# Altium PCB Projekat.PcbDoc
Units mm, origin at the board's own origin, x right, y up, seen from the top; angles counter-clockwise.
Board outline 89.78 x 94.8 mm, 2 copper layers (F.Cu, B.Cu); 71 components, 66 nets, 225 pads, 16 vias.
Unrouted connection lines stored in the file: 6.
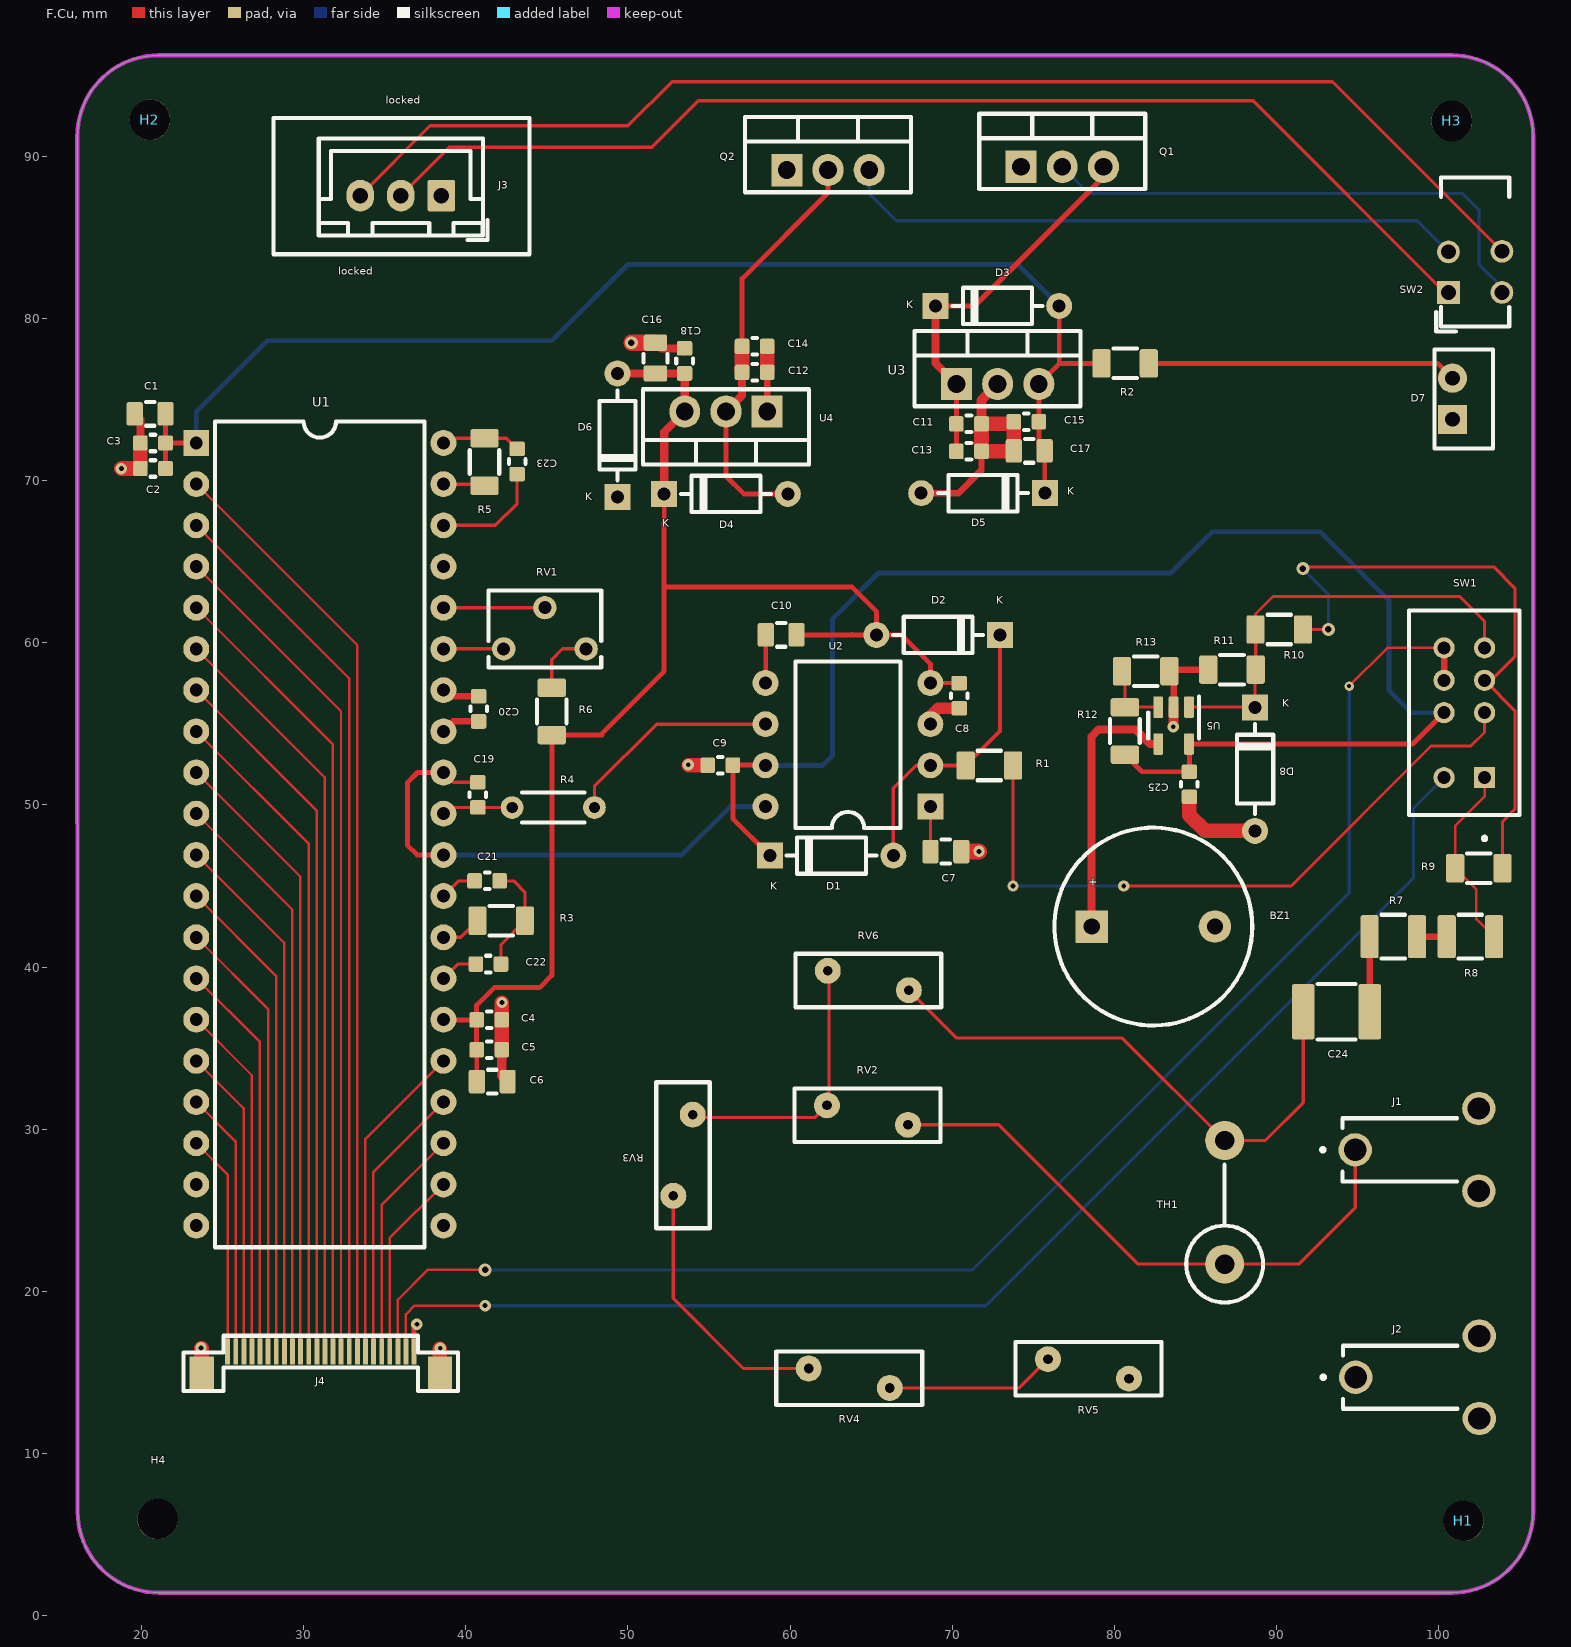
[diagram p0: F.Cu view]
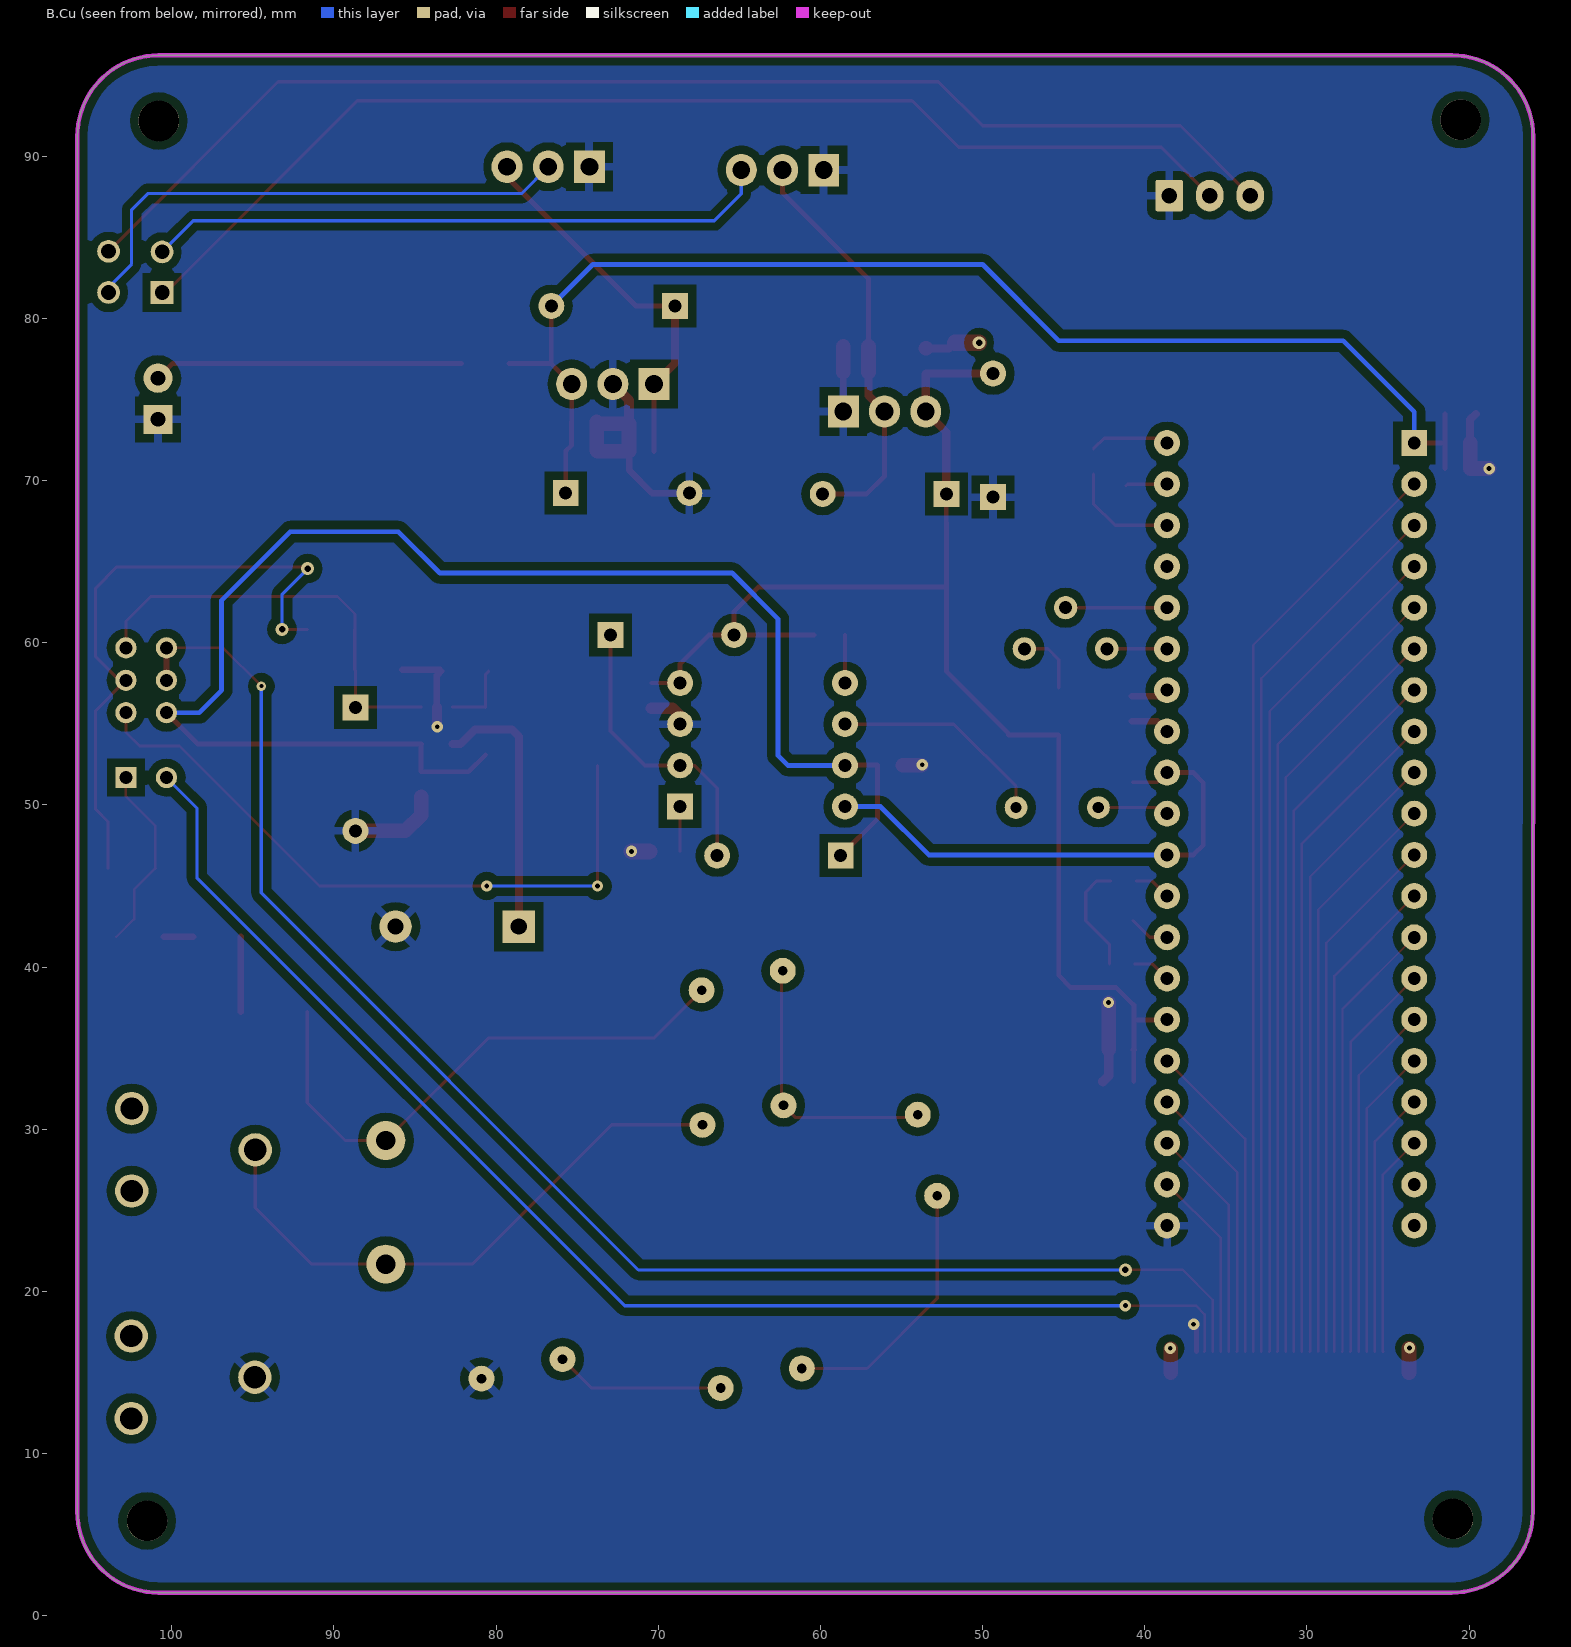
[diagram p1: B.Cu view, seen from below]

## Layer stack, top to bottom
F.Mask: solder mask 0.0102, Solder Resist, Dk 3.5
F.Cu: signal copper 0.0356
Dielectric 1: dielectric 0.32, FR-4, Dk 4.8
B.Cu: signal copper 0.0356
B.Mask: solder mask 0.0102, Solder Resist, Dk 3.5

## Board outline
100.825,1.425 ccw(c100.825,6.425) 105.825,6.425 105.825,91.225 ccw(c100.825,91.225) 100.825,96.225 21.05,96.225 ccw(c21.05,91.225) 16.05,91.225 16.074,6.424 ccw(c21.074,6.425) 21.074,1.425 100.825,1.425

## Design rules (kind name [scope] priority, off if disabled: settings)
Clearance "Clearence 0.508_Polygon" [InNamedPolygon('B.Cu-GND')] p1: gap=0.508 ignorepadtopadclearanceinfootprint=FALSE
MinimumSolderMaskSliver [All] p1: minsoldermaskwidth=0
PolygonConnect Polygon_B.Cu-GND_ConnectDirect [IsNamedPolygon('B.Cu-GND') vs IsVia] p1: connectstyle=Direct reliefconductorwidth=0.254 reliefentries=4 polygonreliefangle="90 Angle" airgapwidth=0.254
PolygonConnect Polygon_B.Cu-GND_ConnectRelief45 [IsNamedPolygon('B.Cu-GND') vs (IsThruPin or IsSMTPin) and (PadShape_AllLayers = 'Round')] p2: connectstyle=Relief reliefconductorwidth=0.5 reliefentries=4 polygonreliefangle="45 Angle" airgapwidth=0.5
PolygonConnect Polygon_B.Cu-GND_ConnectRelief90 [IsNamedPolygon('B.Cu-GND') vs (IsThruPin or IsSMTPin) and (PadShape_AllLayers <> 'Round')] p3: connectstyle=Relief reliefconductorwidth=0.5 reliefentries=4 polygonreliefangle="90 Angle" airgapwidth=0.5
RoutingVias [All] p1: holewidth=0.711 width=1.27 viastyle="Through Hole" minholewidth=0.711 minwidth=1.27 maxholewidth=0.711 maxwidth=1.27
SilkToSilkClearance [All] p1: silktosilkclearance=0
SilkToSolderMaskClearance [IsPad] p1: minsilkscreentomaskgap=0 clearancetoexposedcopper=TRUE
SolderMaskExpansion [All] p1: expansion=0.102 istentingtop=FALSE
Width [All] p1: maxlimit=10 minlimit=0.254 preferedwidth=0.254 minimp=50.000000 maximp=50.000000 favimp=50.000000
27 further rules are at their usual default settings.

## Components (designator, comment, footprint, x,y, rotation, side; value= is the part's Value field where it differs from the comment)
BZ1 "Buzzer" Buzzer_12x9.5RM7.6 78.6,42.5 r0 top
C1 "10u" C_0805_2012Metric 20.54,74.117 r180 top
C2 "100n" C_0603_1608Metric 20.715,70.747 r180 top
C3 "100n" C_0603_1608Metric 20.715,72.317 r180 top
C4 "100n" C_0603_1608Metric 41.45,36.747 r180 top
C5 "100n" C_0603_1608Metric 41.45,34.902 r180 top
C6 "10u" C_0805_2012Metric 41.635,32.94 r180 top
C7 "10u" C_0805_2012Metric 69.61,47.125 r0 top
C8 "100n" C_0603_1608Metric 70.43,56.74 r270 top
C9 "100n" C_0603_1608Metric 55.7,52.45 r180 top
C10 "3u3" C_0805_2012Metric 59.45,60.49 r0 top
C11 "100u" C_0603_1608Metric 71.03,73.495 r0 top
C12 "100u" C_0603_1608Metric 57.815,76.675 r180 top
C13 "100n" C_0603_1608Metric 71.03,71.805 r0 top
C14 "100n" C_0603_1608Metric 57.815,78.275 r0 top
C15 "100n" C_0603_1608Metric 74.573,73.63 r180 top
C16 "100n" C_0603_1608Metric 53.495,77.38 r90 top
C17 "1u" C_0805_2012Metric 74.75,71.835 r180 top
C18 "1u" C_0805_2012Metric 51.7,77.555 r270 top
C19 "20p" C_0603_1608Metric 40.75,50.622 r90 top
C20 "100n" C_0603_1608Metric 40.8,55.922 r270 top
C21 "470n" C_0603_1608Metric 41.32,45.317 r180 top
C22 "220n" C_0603_1608Metric 41.4,40.187 r0 top
C23 "100p" C_0603_1608Metric 43.17,71.177 r270 top
C24 "22n" C_1812_4532Metric 93.7,37.25 r0 top
C25 "100n" C_0603_1608Metric 84.625,51.27 r270 top
D1 "1N4148" D_DO-35_SOD27_P7.62mm_Horizontal 58.75,46.88 r0 top
D2 "1N4148" D_DO-35_SOD27_P7.62mm_Horizontal 72.94,60.485 r180 top
D3 "1N4448" D_DO-35_SOD27_P7.62mm_Horizontal 68.977,80.77 r0 top
D4 "1N4448" D_DO-35_SOD27_P7.62mm_Horizontal 52.24,69.18 r0 top
D5 "1N4448" D_DO-35_SOD27_P7.62mm_Horizontal 75.707,69.225 r180 top
D6 "1N4448" D_DO-35_SOD27_P7.62mm_Horizontal 49.36,68.985 r90 top
D7 "Power ON" LED_D5.0mm_Horizontal_O6.35mm_Z15.0mm 100.85,73.775 r90 top
D8 "1N5712" D_DO-35_SOD27_P7.62mm_Horizontal 88.675,56.02 r270 top
H1 "MountingHole" MountingHole_2.5mm 101.525,5.85 r0 top
H2 "MountingHole" MountingHole_2.5mm 20.525,92.25 r0 top
H3 "MountingHole" MountingHole_2.5mm 100.8,92.175 r0 top
H4 "MountingHole" MountingHole_2.5mm 21,5.975 r0 top
J1 "VAC" TE_350180 94.85,28.735 r0 top
J2 "COMM" TE_350180 94.88,14.71 r0 top
J3 "Battery connector" JST_XH_B3B-XH-A_1x03_P2.50mm_Vertical 38.5,87.575 r180 top
J4 "FPC Connector" FPC_24 31.07,16.29 r0 top
Q1 "IRF4905" TO-220-3_Vertical 74.245,89.35 r0 top
Q2 "IRF4905" TO-220-3_Vertical 59.8,89.15 r0 top
R1 "47K" R_1206_3216Metric 72.29,52.435 r0 top
R2 "330" R_1206_3216Metric 80.663,77.225 r0 top
R3 "47K" R_1206_3216Metric 42.186,42.861 r0 top
R4 "1M" R_Axial_DIN0204_L3.6mm_D1.6mm_P5.08mm_Horizontal 42.86,49.84 r0 top
R5 "100K" R_1206_3216Metric 41.16,71.147 r90 top
R6 "24K" R_1206_3216Metric 45.31,55.765 r90 top
R7 "9M" R_1210_3225Metric 97.2,41.875 r0 top
R8 "900K" R_1210_3225Metric 101.95,41.875 r180 top
R9 "90K" R_1206_3216Metric 102.475,46.1 r0 top
R10 "9K" R_1206_3216Metric 90.162,60.82 r180 top
R11 "1K" R_1206_3216Metric 87.25,58.345 r180 top
R12 "11K" R_1206_3216Metric 80.65,54.557 r90 top
R13 "1K5" R_1206_3216Metric 81.925,58.245 r0 top
RV1 "Naponska referenca (100mV)" Potentiometer_Bourns_3266W_Vertical 42.345,59.625 r180 top
RV2 "910V" RV_Disc_D9mm_W3.3mm_P5mm 67.275,30.275 r180 top
RV3 "910V" RV_Disc_D9mm_W3.3mm_P5mm 54,30.9 r270 top
RV4 "910V" RV_Disc_D9mm_W3.3mm_P5mm 61.15,15.25 r0 top
RV5 "910V" RV_Disc_D9mm_W3.3mm_P5mm 75.9,15.825 r0 top
RV6 "910V" RV_Disc_D9mm_W3.3mm_P5mm 67.325,38.575 r180 top
SW1 "Range selection" SW_EG2310 101.575,55.687 r90 top
SW2 "Power ON/OFF" SW_CuK_JS202011AQN_DPDT_Angled 100.599,81.6 r90 top
TH1 "PTC" R_Axial_DIN0414_L11.9mm_D4.5mm_P7.62mm_Vertical 86.8,21.69 r90 top
U1 "ICL7107CPL" DIP-40_W15.24mm 23.385,72.32 r0 top
U2 "AD737" DIP-8_W10.16mm 68.65,49.9 r180 top
U3 "L7805" TO-220-3_Vertical 70.26,75.955 r0 top
U4 "L7905" TO-220-3_Vertical 58.59,74.26 r180 top
U5 "MAX9075" SOT-23-5 83.65,54.895 r270 top

## Footprints (in the part's own frame and the unit in brackets; to place one, negate y for a bottom-side part, rotate by r counter-clockwise, add the part's x,y. Pads: shape width x height; smd on the part's side, far side on the other; paste and mask are expansions set on the pad)
Buzzer_12x9.5RM7.6 [mm]
  rect 2x2 hole 1 paste-2539.97 mask+0: 1(0,0)
  round 2 hole 1 paste-2539.97 mask+0: 2(7.6,0)
  silkscreen extent -2.3,-6.1 9.9,6.1
C_0603_1608Metric [mm]
  rrect25% 0.9x0.95 smd mask+0: 1(-0.775,0) 2(0.775,0)
  silkscreen extent -0.14,-0.51 0.14,0.51
C_0805_2012Metric [mm]
  rrect25% 1x1.45 smd mask+0: 1(-0.95,0) 2(0.95,0)
  silkscreen extent -0.26,-0.73 0.26,0.73
C_1812_4532Metric [mm]
  rrect18% 1.4x3.4 smd mask+0: 1(-2.05,0) 2(2.05,0)
  silkscreen extent -1.16,-1.71 1.16,1.71
D_DO-35_SOD27_P7.62mm_Horizontal [mm]
  rect 1.6x1.6 hole 0.8 paste-2539.97 mask+0: 1(0,0)
  rrect100% 1.6x1.6 hole 0.8 paste-2539.97 mask+0: 2(7.62,0)
  silkscreen extent 1.04,-1.12 6.58,1.12
DIP-8_W10.16mm [mm]
  rect 1.6x1.6 hole 0.8 paste-2539.97 mask+0: 1(0,0)
  rrect100% 1.6x1.6 hole 0.8 paste-2539.97 mask+0: 2(0,-2.54) 3(0,-5.08) 4(0,-7.62) 5(10.16,-7.62) 6(10.16,-5.08) 7(10.16,-2.54) 8(10.16,0)
  silkscreen extent 1.85,-8.95 8.31,1.33
DIP-40_W15.24mm [mm]
  rect 1.6x1.6 hole 0.8 paste-2539.97 mask+0: 1(0,0)
  rrect100% 1.6x1.6 hole 0.8 paste-2539.97 mask+0: 2(0,-2.54) 3(0,-5.08) 4(0,-7.62) 5(0,-10.16) 6(0,-12.7) 7(0,-15.24) 8(0,-17.78) 9(0,-20.32) 10(0,-22.86) 11(0,-25.4) 12(0,-27.94) 13(0,-30.48) 14(0,-33.02) 15(0,-35.56) 16(0,-38.1) 17(0,-40.64) 18(0,-43.18) 19(0,-45.72) 20(0,-48.26) 21(15.24,-48.26) 22(15.24,-45.72) 23(15.24,-43.18) 24(15.24,-40.64) 25(15.24,-38.1) 26(15.24,-35.56) 27(15.24,-33.02) 28(15.24,-30.48) 29(15.24,-27.94) 30(15.24,-25.4) 31(15.24,-22.86) 32(15.24,-20.32) 33(15.24,-17.78) 34(15.24,-15.24) 35(15.24,-12.7) 36(15.24,-10.16) 37(15.24,-7.62) 38(15.24,-5.08) 39(15.24,-2.54) 40(15.24,0)
  silkscreen extent 1.16,-49.59 14.08,1.33
FPC_24 [mm]
  rect 1.5x2 smd mask+0: 0(-7.35,-1.3) 0(7.35,-1.3)
  rect 0.3x1.6 smd mask+0: 1(-5.75,0) 2(-5.25,0) 3(-4.75,0) 4(-4.25,0) 5(-3.75,0) 6(-3.25,0) 7(-2.75,0) 8(-2.25,0) 9(-1.75,0) 10(-1.25,0) 11(-0.75,0) 12(-0.25,0) 13(0.25,0) 14(0.75,0) 15(1.25,0) 16(1.75,0) 17(2.25,0) 18(2.75,0) 19(3.25,0) 20(3.75,0) 21(4.25,0) 22(4.75,0) 23(5.25,0) 24(5.75,0)
  silkscreen extent -8.46,-2.42 8.46,0.98
JST_XH_B3B-XH-A_1x03_P2.50mm_Vertical [mm]
  rrect15% 1.7x1.95 hole 0.95 paste-2539.97 mask+0: 1(0,0)
  rrect100% 1.7x1.95 hole 0.95 paste-2539.97 mask+0: 2(2.5,0) 3(5,0)
  silkscreen extent -2.85,-3.51 7.56,2.75
LED_D5.0mm_Horizontal_O6.35mm_Z15.0mm [mm]
  rect 1.8x1.8 hole 0.9 paste-2539.97 mask+0: 1(0,0)
  round 1.8 hole 0.9 paste-2539.97 mask+0: 2(2.54,0)
  silkscreen extent -1.8,-2.5 4.3,1.1
MountingHole_2.5mm [mm]
  round 2.5 hole 2.5 paste-2539.97 mask+0: Un1(0,0)
Potentiometer_Bourns_3266W_Vertical [mm]
  round 1.44 hole 0.8 paste-2539.97 mask+0: 1(0,0) 2(-2.54,-2.54) 3(-5.08,0)
  silkscreen extent -6.01,-3.6 0.93,1.14
R_1206_3216Metric [mm]
  rrect22% 1.125x1.75 smd mask+0: 1(-1.462,0) 2(1.462,0)
  silkscreen extent -0.73,-0.91 0.73,0.91
R_1210_3225Metric [mm]
  rrect22% 1.125x2.65 smd mask+0: 1(-1.462,0) 2(1.462,0)
  silkscreen extent -0.72,-1.36 0.72,1.36
R_Axial_DIN0204_L3.6mm_D1.6mm_P5.08mm_Horizontal [mm]
  round 1.4 hole 0.7 paste-2539.97 mask+0: 1(0,0)
  rrect100% 1.4x1.4 hole 0.7 paste-2539.97 mask+0: 2(5.08,0)
  silkscreen extent 0.62,-0.92 4.46,0.92
R_Axial_DIN0414_L11.9mm_D4.5mm_P7.62mm_Vertical [mm]
  round 2.4 hole 1.2 paste-2539.97 mask+0: 1(0,0)
  rrect100% 2.4x2.4 hole 1.2 paste-2539.97 mask+0: 2(7.62,0)
  silkscreen extent -2.37,-2.37 6.12,2.37
RV_Disc_D9mm_W3.3mm_P5mm [mm]
  round 1.6 hole 0.6 paste-2539.97 mask+0: 1(0,0) 2(5,-1.2)
  silkscreen extent -2,-2.25 7,1.05
SOT-23-5 [mm]
  rrect25% 1.325x0.6 smd mask+0: 1(-1.138,0.95) 2(-1.138,0) 3(-1.138,-0.95) 4(1.138,-0.95) 5(1.138,0.95)
  silkscreen extent -1.8,-1.56 0.8,1.56
SW_CuK_JS202011AQN_DPDT_Angled [mm]
  rect 1.4x1.4 hole 0.9 paste-2539.97 mask+0: 1(0,0)
  round 1.4 hole 0.9 paste-2539.97 mask+0: 2(2.5,0) 3(2.54,-3.3) 4(0,-3.3)
  silkscreen extent -2.4,-3.75 7.1,0.75
SW_EG2310 [mm]
  rect 1.308x1.308 hole 0.8 paste-2539.97 mask+0.102: 1(-4,-1.25)
  round 1.308 hole 0.8 paste-2539.97 mask+0.102: 2(0,-1.25) 3(2,-1.25) 4(4,-1.25) 5(-4,1.25) 6(0,1.25) 7(2,1.25) 8(4,1.25)
  silkscreen extent -7.85,-3.4 6.3,3.4
TE_350180 [mil]
  round 81 hole 54 paste-99999 mask+4.02: 1(0,0) S1(300,100) S2(300,-100)
  silkscreen extent -83,-76 247,76
TO-220-3_Vertical [mm]
  rect 1.905x2 hole 1.1 paste-2539.97 mask+0: 1(0,0)
  rrect100% 1.905x2 hole 1.1 paste-2539.97 mask+0: 2(2.54,0) 3(5.08,0)
  silkscreen extent -2.58,-1.37 7.66,3.27

## Part data
BZ1: library part Buzzer_12x9.5RM7.6, "Generic Buzzer, D12mm height 9.5mm with RM7.6mm", Sheetfile=Input.kicad_sch, Sheetname=Input, ki_description="Buzzer, polarized", ki_keywords="quartz resonator ceramic"
C1 C6 C10 C17 C18: library part C_0805_2012Metric, "Capacitor SMD 0805 (2012 Metric), square (rectangular) end terminal, IPC_7351 nominal, (Body size source: IPC-SM-782 page 76, https://www.pcb-3d.com/wordpress/wp-content/uploads/ipc-sm-782a_amendment_1_and_2.pdf, https://docs.google.com/spreadsheets/d/1BsfQQcO9C6DZCsRaXUlFlo91Tg2WpOkGARC1WS5S8t0/edit?usp=sharing), generated with kicad-footprint-generator", Rated Voltage=16V
  C1 C6: Sheetfile=Projekat.kicad_sch
  C10: Sheetfile=rmstodc.kicad_sch, Sheetname=RMS-DC
  C17 C18: Sheetfile=VoltageSupply.kicad_sch, Sheetname="Voltage Supply 5V"
C2 C3 C4 C5 C8 C9 C13 C14 C15 C16 C19 C20 C21 C22 C23 C25: library part C_0603_1608Metric, "Capacitor SMD 0603 (1608 Metric), square (rectangular) end terminal, IPC_7351 nominal, (Body size source: IPC-SM-782 page 76, https://www.pcb-3d.com/wordpress/wp-content/uploads/ipc-sm-782a_amendment_1_and_2.pdf), generated with kicad-footprint-generator", ki_description="Unpolarized capacitor", ki_keywords="cap capacitor"
  C2 C3 C4 C5: Sheetfile=Projekat.kicad_sch
  C8 C9: Sheetfile=rmstodc.kicad_sch, Sheetname=RMS-DC
  C13 C14 C15 C16: Sheetfile=VoltageSupply.kicad_sch, Sheetname="Voltage Supply 5V"
  C19 C20 C21 C22 C23: Sheetfile=icl7107pins.kicad_sch, Sheetname=7107-PINS
  C25: Sheetfile=Input.kicad_sch, Sheetname=Input
C7: library part C_0805_2012Metric, "Capacitor SMD 0805 (2012 Metric), square (rectangular) end terminal, IPC_7351 nominal, (Body size source: IPC-SM-782 page 76, https://www.pcb-3d.com/wordpress/wp-content/uploads/ipc-sm-782a_amendment_1_and_2.pdf, https://docs.google.com/spreadsheets/d/1BsfQQcO9C6DZCsRaXUlFlo91Tg2WpOkGARC1WS5S8t0/edit?usp=sharing), generated with kicad-footprint-generator", Sheetfile=rmstodc.kicad_sch, Sheetname=RMS-DC, ki_description="Unpolarized capacitor", ki_keywords="cap capacitor"
C11 C12: library part C_0603_1608Metric, "Capacitor SMD 0603 (1608 Metric), square (rectangular) end terminal, IPC_7351 nominal, (Body size source: IPC-SM-782 page 76, https://www.pcb-3d.com/wordpress/wp-content/uploads/ipc-sm-782a_amendment_1_and_2.pdf), generated with kicad-footprint-generator", Rated Voltage=16V, Sheetfile=VoltageSupply.kicad_sch, Sheetname="Voltage Supply 5V"
C24: library part C_1812_4532Metric, "Capacitor SMD 1812 (4532 Metric), square (rectangular) end terminal, IPC_7351 nominal, (Body size source: IPC-SM-782 page 76, https://www.pcb-3d.com/wordpress/wp-content/uploads/ipc-sm-782a_amendment_1_and_2.pdf), generated with kicad-footprint-generator", Rated Voltage=1200V, Sheetfile=Input.kicad_sch, Sheetname=Input, ki_description="Unpolarized capacitor", ki_keywords="cap capacitor"
D1 D2 D3 D4 D5 D6 D8: library part D_DO-35_SOD27_P7.62mm_Horizontal, "Diode, DO-35_SOD27 series, Axial, Horizontal, pin pitch=7.62mm, , length*diameter=4*2mm^2, , http://www.diodes.com/_files/packages/DO-35.pdf"
  D1 D2: Sheetfile=rmstodc.kicad_sch, Sheetname=RMS-DC, ki_description="100V 0.15A standard switching diode, DO-35", ki_keywords=diode
  D3 D4 D5 D6: Sheetfile=VoltageSupply.kicad_sch, Sheetname="Voltage Supply 5V", ki_description="100V 0.15A High-speed standard diode, DO-35", ki_keywords=diode
  D8: Sheetfile=Input.kicad_sch, Sheetname=Input, ki_description="20V 75mA Schottky diode, DO-35", ki_keywords="diode Schottky"
D7: library part LED_D5.0mm_Horizontal_O6.35mm_Z15.0mm, "LED, diameter 5.0mm z-position of LED center 3.0mm, 2 pins, diameter 5.0mm z-position of LED center 3.0mm, 2 pins, diameter 5.0mm z-position of LED center 3.0mm, 2 pins, diameter 5.0mm z-position of LED center 9.0mm, 2 pins, diameter 5.0mm z-position of LED center 9.0mm, 2 pins, diameter 5.0mm z-position of LED center 9.0mm, 2 pins, diameter 5.0mm z-position of LED center 15.0mm, 2 pins, diameter 5.0mm z-position of LED center 15.0mm, 2 pins, diameter 5.0mm z-position of LED center 15.0mm, 2 pins", Sheetfile=VoltageSupply.kicad_sch, Sheetname="Voltage Supply 5V", ki_description="Light emitting diode", ki_keywords="LED diode"
H1 H2 H3 H4: library part MountingHole_2.5mm, "Mounting Hole 2.5mm, no annular", Sheetfile=Projekat.kicad_sch, ki_description="Mounting Hole without connection", ki_keywords="mounting hole"
J1 J2: library part TE_350180, Sheetfile=Input.kicad_sch, Sheetname=Input, ki_description="Generic connector, single row, 01x01, script generated (kicad-library-utils/schlib/autogen/connector/)", ki_keywords=connector
J3: library part JST_XH_B3B-XH-A_1x03_P2.50mm_Vertical, "JST XH series connector, B3B-XH-A (http://www.jst-mfg.com/product/pdf/eng/eXH.pdf), generated with kicad-footprint-generator", Sheetfile=Battery.kicad_sch, Sheetname=Battery, ki_description="Generic connector, single row, 01x03, script generated (kicad-library-utils/schlib/autogen/connector/)", ki_keywords=connector
J4: library part FPC_24, Sheetfile=ffccon.kicad_sch, Sheetname="FFC Connector", ki_description="Generic connector, single row, 01x24, script generated (kicad-library-utils/schlib/autogen/connector/)", ki_keywords=connector
Q1 Q2 U3 U4: library part TO-220-3_Vertical, "TO-220-3, Vertical, RM 2.54mm, see https://www.vishay.com/docs/66542/to-220-1.pdf"
  Q1 Q2: Sheetfile=Battery.kicad_sch, Sheetname=Battery, ki_description="-74A Id, -55V Vds, Single P-Channel HEXFET Power MOSFET, 20mOhm Ron, TO-220AB", ki_keywords="Single P-Channel HEXFET Power MOSFET"
  U3: Sheetfile=VoltageSupply.kicad_sch, Sheetname="Voltage Supply 5V", ki_description="Positive 1.5A 35V Linear Regulator, Fixed Output 5V, TO-220/TO-263/TO-252", ki_keywords="Voltage Regulator 1.5A Positive"
  U4: Sheetfile=VoltageSupply.kicad_sch, Sheetname="Voltage Supply 5V", ki_description="Negative 1.5A 35V Linear Regulator, Fixed Output -5V, TO-220/TO-263", ki_keywords="Voltage Regulator 1.5A Negative"
R1: library part R_1206_3216Metric, "Resistor SMD 1206 (3216 Metric), square (rectangular) end terminal, IPC_7351 nominal, (Body size source: IPC-SM-782 page 72, https://www.pcb-3d.com/wordpress/wp-content/uploads/ipc-sm-782a_amendment_1_and_2.pdf), generated with kicad-footprint-generator", Power Rating=1W, Sheetfile=rmstodc.kicad_sch, Sheetname=RMS-DC, ki_description="Resistor, US symbol", ki_keywords="R res resistor"
R2 R3 R5 R6 R9 R10 R11 R12 R13: library part R_1206_3216Metric, "Resistor SMD 1206 (3216 Metric), square (rectangular) end terminal, IPC_7351 nominal, (Body size source: IPC-SM-782 page 72, https://www.pcb-3d.com/wordpress/wp-content/uploads/ipc-sm-782a_amendment_1_and_2.pdf), generated with kicad-footprint-generator", ki_description="Resistor, US symbol", ki_keywords="R res resistor"
  R2: Sheetfile=VoltageSupply.kicad_sch, Sheetname="Voltage Supply 5V"
  R3 R5 R6: Sheetfile=icl7107pins.kicad_sch, Sheetname=7107-PINS
  R9 R10 R11 R12 R13: Sheetfile=Input.kicad_sch, Sheetname=Input
R4: library part R_Axial_DIN0204_L3.6mm_D1.6mm_P5.08mm_Horizontal, "Resistor, Axial_DIN0204 series, Axial, Horizontal, pin pitch=5.08mm, 0.167W, length*diameter=3.6*1.6mm^2, http://cdn-reichelt.de/documents/datenblatt/B400/1_4W%23YAG.pdf", Sheetfile=icl7107pins.kicad_sch, Sheetname=7107-PINS, ki_description="Resistor, US symbol", ki_keywords="R res resistor"
R7 R8: library part R_1210_3225Metric, "Resistor SMD 1210 (3225 Metric), square (rectangular) end terminal, IPC_7351 nominal, (Body size source: IPC-SM-782 page 72, https://www.pcb-3d.com/wordpress/wp-content/uploads/ipc-sm-782a_amendment_1_and_2.pdf), generated with kicad-footprint-generator", Sheetfile=Input.kicad_sch, Sheetname=Input, ki_description="Resistor, US symbol", ki_keywords="R res resistor"
RV1: library part Potentiometer_Bourns_3266W_Vertical, "Potentiometer, vertical, Bourns 3266W, https://www.bourns.com/docs/Product-Datasheets/3266.pdf", Sheetfile=icl7107pins.kicad_sch, Sheetname=7107-PINS, Val=100mV, ki_description="Trim-potentiometer, US symbol", ki_keywords="resistor variable trimpot trimmer"
RV2 RV3 RV4 RV5 RV6: library part RV_Disc_D9mm_W3.3mm_P5mm, "Varistor, diameter 9mm, width 3.3mm, pitch 5mm", Sheetfile=Input.kicad_sch, Sheetname=Input, ki_description="Voltage dependent resistor", ki_keywords="VDR resistance"
SW1: library part SW_EG2310, MANUFACTURER=E-Switch, MAXIMUM_PACKAGE_HEIGHT=4.7mm, Package=None, Availability="In Stock", Check_prices=https://www.snapeda.com/parts/EG2310/E-Switch/view-part/?ref=eda, Description="\nSlide Switch DP3T Through Hole, Right Angle\n", MF=E-Switch, MP=EG2310, PARTREV=-, Price=None, Purchase-URL=https://www.snapeda.com/api/url_track_click_mouser/?unipart_id=396456&manufacturer=E-Switch&part_name=EG2310&search_term=None, SNAPEDA_PN=EG2310, STANDARD="Manufacturer Recommendations", Sheetfile=Input.kicad_sch, Sheetname=Input, SnapEDA_Link=https://www.snapeda.com/parts/EG2310/E-Switch/view-part/?ref=snap
SW2: library part SW_CuK_JS202011AQN_DPDT_Angled, "CuK sub miniature slide switch, JS series, DPDT, right angle, http://www.ckswitches.com/media/1422/js.pdf", Sheetfile=Battery.kicad_sch, Sheetname=Battery, ki_description="Double Pole Single Throw (DPST) Switch", ki_keywords="switch dual double-pole single-throw OFF-ON"
TH1: library part R_Axial_DIN0414_L11.9mm_D4.5mm_P7.62mm_Vertical, "Resistor, Axial_DIN0414 series, Axial, Vertical, pin pitch=7.62mm, 2W, length*diameter=11.9*4.5mm^2, http://www.vishay.com/docs/20128/wkxwrx.pdf", Sheetfile=Input.kicad_sch, Sheetname=Input, ki_description="Thermistor, temperature dependent resistor, US symbol", ki_keywords="R res thermistor"
U1: library part DIP-40_W15.24mm, "40-lead though-hole mounted DIP package, row spacing 15.24 mm (600 mils)", Sheetfile=Projekat.kicad_sch, ki_description="3 1/2 Digit, LED Display, A/D Converter, DIP-40", ki_keywords="LED ADC"
U2: library part DIP-8_W10.16mm, "8-lead though-hole mounted DIP package, row spacing 10.16 mm (400 mils)", Sheetfile=rmstodc.kicad_sch, Sheetname=RMS-DC
U5: library part SOT-23-5, "SOT, 5 Pin (https://www.jedec.org/sites/default/files/docs/Mo-178c.PDF variant AA), generated with kicad-footprint-generator ipc_gullwing_generator.py", Sheetfile=Input.kicad_sch, Sheetname=Input, ki_description="Single, 1.8V Low Power, Rail-to-Rail Input, Push-Pull Output Comparator, SOT-23-5/SC-70-5", ki_keywords=cmp

## Via types
v1: diameter 0.7, hole 0.3, F.Cu to B.Cu, tented both sides, 11 vias
v2: diameter 0.8, hole 0.4, F.Cu to B.Cu, tented both sides, 4 vias
v3: diameter 0.6, hole 0.25, F.Cu to B.Cu, tented both sides, 1 vias

## Nets (pads, with @x,y where several pads share a name; then routed paths per layer and width w, separated by ;. In a path a pad name is that pad's centre, name@x,y a point inside that pad or via, vN(x,y) a via of type N, cw(c..) or ccw(c..) an arc to the next point about the centre after c; other vN are vias at no path point)
20V_RANGE: J4.23 SW1.5 | length 82.6
  F.Cu w0.152: J4.23 36.31,16.3 36.31,18.585 36.85,19.125 v1(41.2,19.125)
  B.Cu w0.2: v1(41.2,19.125) 72.075,19.125 98.45,45.5 98.45,49.812 SW1.5
1000V_RANGE: J4.22 SW1.7 SW1.8 | length 93.8
  F.Cu w0.15: v3(94.475,57.325) 96.837,59.687 SW1.8
  F.Cu w0.152: J4.22 35.81,16.3 35.81,19.485 37.65,21.325 39.525,21.325 v2(41.2,21.325)
  F.Cu w0.4: SW1.7 SW1.8
  B.Cu w0.2: v2(41.2,21.325) 42.075,21.325 71.225,21.325 94.475,44.575 v3(94.475,57.325)
+5V: U1.1 U3.3
+9V: C11.1 C13.1 D3.1 Q1.3 U3.1 | length 23.8
  F.Cu w0.25: D3.1 D3.1@69.013,80.805
  F.Cu w0.3: C13.1 C11.1 70.26,73.5 U3.1
  F.Cu w0.305: D3.1 71.37,80.77 79.325,88.725 Q1.3
  F.Cu w0.5: D3.1 68.977,77.237 U3.1
-5V: C1.1 C2.1 C3.1 C4.2 C5.2 C6.2 C8.1 C9.1 C10.2 C15.1 C16.1 C16.2 C17.1 C18.1 C18.2 C25.1 D1.1 D2.2 D3.2 D4.1 D5.1 D6.2 R2.1 R6.1 R12.1 SW1.6 U1.26 U2.4 U2.7 U4.3 U5.5 | length 261.1
  F.Cu w0.2: C16.1 C16.1@53.51,76.59
  F.Cu w0.25: v2(50.215,78.5) v2@50.22,78.505 ; C10.2 C10.2@60.405,60.485 ; U2.4 68.655,57.515 C8.1
  F.Cu w0.3: C2.1 C3.1 C1.1 ; U1.26 38.637,36.747 C4.2 ; C5.2 C4.2 ; C6.2 C5.2@40.685,34.892 ; 48.402,54.302 48.3,54.302 R6.1 45.31,39.49 44.56,38.74 41.76,38.74 40.675,37.655 C4.2 ; 52.24,67.39 D4.1 ; C10.2 63.3,60.49 63.85,60.49 ; 63.815,60.525 63.85,60.49 ; U2.4 68.65,58.7 66.865,60.485 D2.2 65.315,60.49 63.85,60.49 ; D5.1 75.707,71.827 C17.1 75.347,72.187 C15.1 75.34,73.637 75.34,75.955 76.597,77.212 ; D3.2 76.597,77.212 ; R2.1 79.187,77.212 76.597,77.212 ; R12.1 81.7,52.045 C25.1 84.625,53.732 U5.5 98.395,53.757 SW1.6
  F.Cu w0.305: C3.1 23.383,72.317 23.385,72.32 ; 48.3,54.302 52.24,58.242 52.24,63.45 ; 52.24,67.39 52.24,63.45 ; U2.7 58.48,52.45 C9.1 56.475,49.155 D1.1 ; D2.2 65.32,61.945 63.815,63.45 52.24,63.45
  F.Cu w0.4: C5.2 C5.2@40.685,34.892 ; C18.1 C18.1@51.705,78.5
  F.Cu w0.5: D6.2 C18.2 C16.1 ; C18.1@51.705,78.5 52.055,78.15 C16.2@53.49,78.15 ; D4.1 52.24,72.99 U4.3 C16.1@53.51,76.59
  F.Cu w0.9: C16.2@53.49,78.15 C16.2
  F.Cu w1: v2@50.22,78.505 C18.1
  B.Cu w0.3: U2.7 62.015,52.44 62.61,53.035 62.61,61.46 65.45,64.3 83.475,64.3 86.025,66.85 92.7,66.85 96.925,62.625 96.925,57.075 98.313,55.687 SW1.6 ; D5.1 D5.1@75.713,69.22
  B.Cu w0.305: 23.385,72.32 23.385,74.245 27.765,78.625 45.3,78.625 50,83.325 74.043,83.325 D3.2
-9V: C12.2 C14.1 D4.2 Q2.2 U4.2 | length 25.8
  F.Cu w0.25: C14.1@57.03,78.285 C14.1
  F.Cu w0.3: U4.2 56.05,70.275 57.145,69.18 D4.2
  F.Cu w0.305: C14.1 57.05,78.285 57.05,82.45 62.34,87.74 Q2.2
  F.Cu w0.5: U4.2 57.04,75.25 C12.2
  F.Cu w0.9: C12.2 C14.1
A-Z: C21.2 U1.29 | length 2.3
  F.Cu w0.2: U1.29 39.562,45.317 C21.2
AD737_COM: C19.2 RV1.1 U1.30 U1.32 U1.35 U2.8 | length 36
  F.Cu w0.2: U1.32 39.228,51.397 C19.2 ; U1.35 38.63,59.625 RV1.1
  F.Cu w0.3: U1.30 37.005,46.92 36.4,47.525 36.4,51.375 37.025,52 U1.32
  B.Cu w0.3: U1.30 53.32,46.92 56.3,49.9 U2.8
AD737_OUTPUT: R4.2 U2.6 | length 13.4
  F.Cu w0.2: R4.2 47.94,51.14 51.775,54.975 58.485,54.975 U2.6
BUFF: R3.1 U1.28 | length 2.5
  F.Cu w0.2: U1.28 39.703,41.84 R3.1
Cc: C7.1 U2.1 | length 2.8
  F.Cu w0.2: U2.1 68.66,49.89 C7.1
CREF+: C20.1 U1.34 | length 2.3
  F.Cu w0.4: U1.34 39.007,56.697 C20.1
CREF-: C20.2 U1.33 | length 2.4
  F.Cu w0.4: U1.33 39.232,55.147 C20.2
GND: BZ1.2 C1.2 C2.2 C3.2 C4.1 C5.1 C6.1 C7.2 C8.2 C9.2 C11.2 C12.1 C13.2 C14.2 C15.2 C17.2 C25.2 D5.2 D6.1 D7.1 D8.2 J2.1 J3.1 J4.24 Q1.1 Q2.1 R11.2 R13.2 RV5.2 U1.21 U2.3 U3.2 U4.1 U5.2 | length 47.8
  F.Cu w0.2: v1@71.635,47.125 v1(71.65,47.14)
  F.Cu w0.25: U2.3 U2.3@68.65,55.49 ; 71.805,74.917 71.805,74.96 ; C15.2@73.668,73.495 C15.2@73.8,73.627 ; C17.2@73.77,71.805 C17.2
  F.Cu w0.3: J4.24 36.82,17.809 v1(36.986,17.975)
  F.Cu w0.305: v1(18.77,70.74) v1@18.778,70.747 ; v1(53.725,52.475) v1@53.75,52.45 ; J2.1@94.795,14.625 J2.1
  F.Cu w0.4: v1@42.225,37.805 v1(42.235,37.815) ; U4.1 C12.1 ; D5.2 70.383,69.225 71.805,70.647 C13.2 ; C15.2 C15.2@73.8,73.627 ; v1(83.632,54.825) v1@83.65,54.842 ; U5.2 83.65,57.983 R13.2 83.487,58.345 R11.2
  F.Cu w0.5: C1.2 19.94,73.767 C3.2
  F.Cu w0.6: C5.1 42.225,33.3 C6.1 ; C11.2 71.805,74.917 ; 71.805,74.96 U3.2 ; v1@83.65,54.842 U5.2
  F.Cu w0.7: U2.3@68.65,55.49 69.125,55.965 C8.2
  F.Cu w0.9: v1@18.778,70.747 C2.2 C3.2 ; C5.1 C4.1 v1@42.225,37.805 ; v1@53.75,52.45 C9.2 ; C12.1 C14.2 ; C15.2@73.668,73.495 C11.2 C13.2 C17.2@73.77,71.805 ; C17.2 C15.2@73.8,73.627 ; C25.2 84.625,49.375 85.6,48.4 D8.2
  F.Cu w1: C7.2 v1@71.635,47.125
ICL7107_A1: J4.14 U1.5 | length 49.4
  F.Cu w0.152: U1.5 31.81,53.735 31.81,16.3 J4.14
ICL7107_A2: J4.7 U1.12 | length 30.1
  F.Cu w0.152: U1.12 28.31,39.455 28.31,16.3 J4.7
ICL7107_A3: J4.20 U1.23 | length 14.4
  F.Cu w0.152: J4.20 34.81,16.3 34.81,25.325 U1.23
ICL7107_AB4: U1.19
ICL7107_B1: J4.15 U1.4 | length 52.1
  F.Cu w0.152: U1.4 32.31,55.775 32.31,16.3 J4.15
ICL7107_B2: J4.8 U1.11 | length 32.9
  F.Cu w0.152: U1.11 28.81,41.495 28.81,16.3 J4.8
ICL7107_B3: J4.3 U1.16 | length 19.1
  F.Cu w0.152: U1.16 26.31,31.295 26.31,16.3 J4.3
ICL7107_C1: J4.16 U1.3 | length 54.9
  F.Cu w0.152: U1.3 32.81,57.815 32.81,16.3 J4.16
ICL7107_C2: J4.9 U1.10 | length 35.6
  F.Cu w0.152: U1.10 29.31,43.535 29.31,16.3 J4.9
ICL7107_C3: J4.19 U1.24 | length 17.2
  F.Cu w0.152: J4.19 34.31,16.3 34.31,27.365 U1.24
ICL7107_D1: J4.17 U1.2 | length 57.6
  F.Cu w0.152: U1.2 33.31,59.855 33.31,16.3 J4.17
ICL7107_D2: J4.10 U1.9 | length 38.4
  F.Cu w0.152: U1.9 29.81,45.575 29.81,16.3 J4.10
ICL7107_D3: J4.4 U1.15 | length 21.9
  F.Cu w0.152: U1.15 26.81,33.335 26.81,16.3 J4.4
ICL7107_E1: J4.11 U1.8 | length 41.1
  F.Cu w0.152: U1.8 30.31,47.615 30.31,16.3 J4.11
ICL7107_E2: J4.5 U1.14 | length 24.6
  F.Cu w0.152: U1.14 27.31,35.375 27.31,16.3 J4.5
ICL7107_E3: J4.1 U1.18 | length 13.7
  F.Cu w0.15: J4.1@25.31,16.28 J4.1
  F.Cu w0.152: U1.18 25.32,27.205 J4.1
ICL7107_F1: J4.13 U1.6 | length 46.6
  F.Cu w0.152: U1.6 31.31,51.695 31.31,16.3 J4.13
ICL7107_F2: J4.6 U1.13 | length 27.4
  F.Cu w0.152: U1.13 27.81,37.415 27.81,16.3 J4.6
ICL7107_F3: J4.2 U1.17 | length 16.4
  F.Cu w0.152: U1.17 25.81,29.255 25.81,16.3 J4.2
ICL7107_G1: J4.12 U1.7 | length 43.9
  F.Cu w0.152: U1.7 30.81,49.655 30.81,16.3 J4.12
ICL7107_G2: J4.18 U1.25 | length 19.9
  F.Cu w0.152: J4.18 33.81,16.3 33.81,29.405 U1.25
ICL7107_G3: J4.21 U1.22 | length 11.7
  F.Cu w0.152: J4.21 35.31,16.3 35.31,23.285 U1.22
IN_HI: C19.1 R4.1 U1.31 | length 4.4
  F.Cu w0.2: U1.31 39.013,49.847 C19.1 40.758,49.84 R4.1
INT: C22.1 U1.27 | length 2.4
  F.Cu w0.2: U1.27 39.512,40.187 C22.1
Net-(BZ1--): BZ1.1 U5.4 | length 16.4
  F.Cu w0.5: BZ1.1 78.6,49.15 78.6,54.225 79.025,54.65 81.3,54.65 82.193,53.757 U5.4
Net-(C21-Pad1): C21.1 C22.2 R3.2 | length 6.9
  F.Cu w0.2: C21.1 42.958,45.317 43.649,44.626 R3.2 42.175,41.387 C22.2
Net-(C24-Pad1): C24.1 RV6.1 TH1.2 | length 34.7
  F.Cu w0.2: RV6.1 70.275,35.625 80.485,35.625 TH1.2 89.31,29.31 91.65,31.65 C24.1
Net-(C24-Pad2): C24.2 R7.1 | length 4.6
  F.Cu w0.4: R7.1 95.737,37.262 C24.2
Net-(D1-A): D1.2 D2.1 R1.1 U2.2 | length 18.1
  F.Cu w0.2: D1.2 66.37,51.04 67.77,52.44 U2.2
  F.Cu w0.25: U2.2 68.655,52.435 R1.1 72.94,54.547 D2.1
Net-(D7-A): D7.2 R2.2 | length 19.1
  F.Cu w0.305: R2.2 99.94,77.225 D7.2
  F.Cu w0.4: D7.2@100.845,76.32 D7.2
Net-(J1-Pin_1): J1.1 RV2.1 TH1.1 | length 36.1
  F.Cu w0.2: RV2.1 72.875,30.275 81.46,21.69 TH1.1 91.365,21.69 94.85,25.175 J1.1
Net-(J3-Pin_1): J3.3 SW2.3 | length 77.6
  F.Cu w0.2: J3.3 37.8,91.875 50,91.875 52.725,94.6 93.45,94.6 103.899,84.151 SW2.3
Net-(J3-Pin_2): J3.2 SW2.1 | length 71.9
  F.Cu w0.2: J3.2 38.975,90.55 51.475,90.55 54.35,93.425 88.55,93.425 100.375,81.6 SW2.1
Net-(Q1-D): Q1.2 SW2.4 | length 32.5
  B.Cu w0.2: Q1.2 78.435,87.7 101.475,87.7 102.475,86.7 102.475,83.35 103.899,81.926 SW2.4
Net-(Q2-S): Q2.3 SW2.2 | length 38.7
  B.Cu w0.2: Q2.3 64.88,87.695 66.55,86.025 98.674,86.025 SW2.2
Net-(R6-Pad2): R6.2 RV1.3 | length 4.1
  F.Cu w0.2: R6.2 45.31,58.965 45.97,59.625 RV1.3
Net-(R7-Pad2): R7.2 R8.2 | length 1.8
  F.Cu w0.4: R7.2 R8.2
Net-(R8-Pad1): R8.1 R9.1 SW1.1 | length 11.6
  F.Cu w0.152: SW1.1 102.825,50.525 101.013,48.712 R9.1 102.325,44.787 102.325,42.962 R8.1
  F.Cu w0.2: R9.1@101,46.112 R9.1
Net-(R10-Pad1): R9.2 R10.1 SW1.3 | length 39
  F.Cu w0.2: R10.1 93.195,60.82 v2(93.2,60.825) ; v2(91.625,64.575) 91.725,64.675 103.4,64.675 104.7,63.375 104.7,59.15 103.237,57.687 SW1.3 104.7,55.812 104.7,49.725 103.925,48.95 103.925,46.112 R9.2
  B.Cu w0.2: v2(91.625,64.575) 93.2,63 v2(93.2,60.825)
Net-(RV2-Pad2): RV2.2 RV3.1 RV6.2 | length 17
  F.Cu w0.2: RV3.1 54.175,30.725 61.525,30.725 RV2.2 62.4,31.6 62.4,39.7 RV6.2
Net-(RV3-Pad2): RV3.2 RV4.1 | length 16.5
  F.Cu w0.2: RV3.2 52.8,19.575 57.125,15.25 RV4.1
Net-(RV4-Pad2): RV4.2 RV5.1 | length 10.5
  F.Cu w0.2: RV4.2 74.125,14.05 RV5.1
Net-(U2-Cav): C10.1 U2.5 | length 3
  F.Cu w0.25: U2.5 58.5,57.53 C10.1
Net-(U5--): R12.2 R13.1 U5.3 | length 4.4
  F.Cu w0.2: R13.1 80.65,58.057 R12.2 80.663,56.032 U5.3
OSC1: C23.1 R5.2 U1.40 | length 4.9
  F.Cu w0.2: U1.40 38.915,72.61 R5.2 42.513,72.61 C23.1
OSC2: R5.1 U1.39 | length 2.6
  F.Cu w0.2: U1.39 41.065,69.78 R5.1
OSC3: C23.2 U1.38 | length 6.9
  F.Cu w0.2: U1.38 41.835,67.24 43.17,68.575 C23.2
REF_HI: RV1.2 U1.36 | length 6.3
  F.Cu w0.2: U1.36 38.63,62.165 RV1.2
Threshold_voltage: D8.1 R10.2 R11.1 SW1.4 U5.1 | length 26.7
  F.Cu w0.178: R10.2 88.7,61.775 89.775,62.85 101.3,62.85 102.825,61.325 SW1.4
  F.Cu w0.2: U5.1 88.662,56.032 D8.1 88.675,58.307 R11.1 88.712,60.807 R10.2
unconnected-(U1-POL-Pad20): U1.20
unconnected-(U1-TEST-Pad37): U1.37
Vin: R1.2 SW1.2 | length 41.6
  F.Cu w0.178: v1(73.75,45) 73.752,45.002 R1.2 ; v1(80.575,45) 90.9,45 99.525,53.625 101.975,53.625 102.825,54.475 SW1.2
  B.Cu w0.178: v1(73.75,45) v1(80.575,45)
pads on no net: H1.Un1 H2.Un1 H3.Un1 H4.Un1 J1.S1 J1.S2 J2.S1 J2.S2 J4.0
copper on no net: | length 3.1
  F.Cu w0.152: v1(23.68,16.52) v1@23.71,16.49 ; 23.71,15 23.72,14.99 ; 38.41,15 38.42,14.99 ; v1@38.41,16.48 v1(38.43,16.5)
  F.Cu w0.9: 23.71,15 v1@23.71,16.49 ; 38.41,15 v1@38.41,16.48

## Polygon pours and split planes (outlines as drawn)
GND on B.Cu "B.Cu-GND" (solid, remove dead copper, pour order 0): 14.325,0 14.325,97.1 15.4,98.175 108.075,98.175 108.075,0.075 108,0

## Keep-outs
Edge.Cuts:
  lines w0: 16.05,91.225 cw(c21.05,91.225) 21.05,96.225 100.825,96.225 cw(c100.825,91.225) 105.825,91.225 105.825,6.425 cw(c100.825,6.425) 100.825,1.425 21.074,1.425 cw(c21.074,6.425) 16.074,6.424 16.05,91.225
  lines w0.254: 16.05,91.225 cw(c21.05,91.225) 21.05,96.225 100.825,96.225 cw(c100.825,91.225) 105.825,91.225 105.825,6.425 cw(c100.825,6.425) 100.825,1.425 21.074,1.425 cw(c21.074,6.425) 16.074,6.424 16.05,91.225

## Silkscreen, mask and mechanical layers (free items; w line width, h text height)
F.SilkS:
  lines w0.254: 28.146,83.955 43.938,83.955 43.938,92.355 28.146,92.355 28.146,83.955
  text "locked" at 35.061,93.095 h0.8
  text "locked" at 32.146,82.545 h0.8

## Text inside footprints (layer, text, board x,y; h text height)
BZ1: F.Fab "+" at 78.421,44.871 h0.8; F.SilkS "+" at 78.421,44.871 h0.8
D1: F.Fab "K" at 58.779,44.604 h0.8; F.SilkS "K" at 58.779,44.604 h0.8
D2: F.Fab "K" at 72.729,62.261 h0.8; F.SilkS "K" at 72.729,62.261 h0.8
D3: F.Fab "K" at 67.166,80.484 h0.8; F.SilkS "K" at 67.166,80.484 h0.8
D4: F.Fab "K" at 52.124,66.987 h0.8; F.SilkS "K" at 52.124,66.987 h0.8
D5: F.Fab "K" at 77.096,68.969 h0.8; F.SilkS "K" at 77.096,68.979 h0.8
D6: F.Fab "K" at 47.359,68.639 h0.8; F.SilkS "K" at 47.359,68.639 h0.8
D8: F.Fab "K" at 90.364,55.894 h0.8; F.SilkS "K" at 90.364,55.894 h0.8